# EAGLE board Adafruit BNO055 (EAGLE 6.6.0)
REV: C
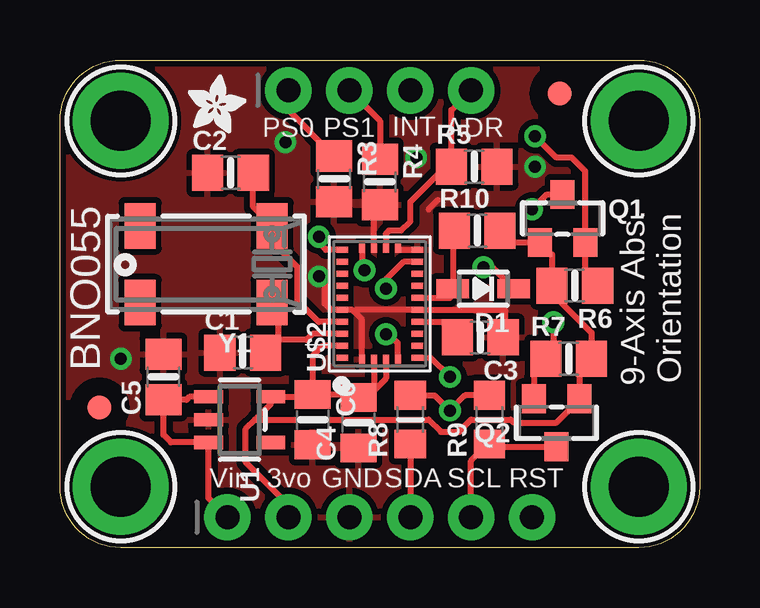
[diagram p0: board, top side]
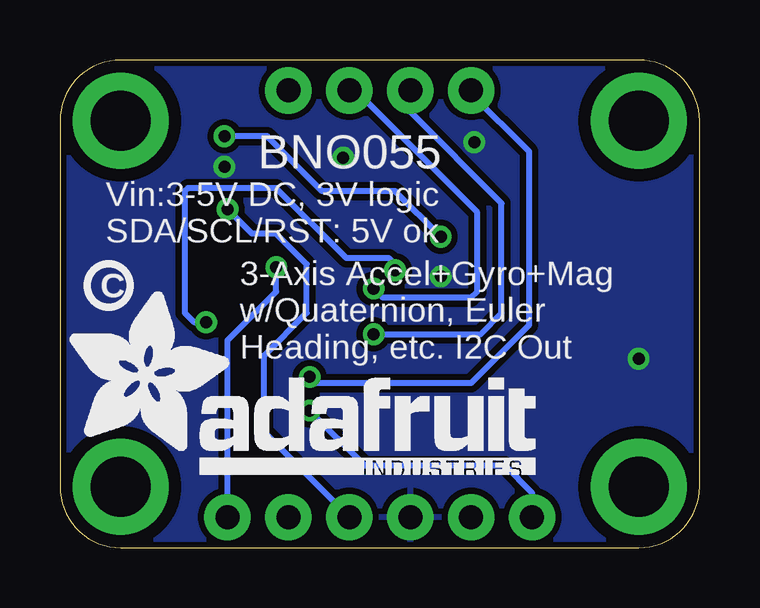
[diagram p1: board, bottom side, seen from below]

Size 26.67 x 20.32 mm. Coordinates in mm from the lower left corner, seen from the top.
Outline: 2.54,20.32 24.13,20.32 arc-90 26.67,17.78 26.67,2.54 arc-90 24.13,0 2.54,0 arc-90 0,2.54 0,17.78 arc-90 2.54,20.32
Copper layers (1*16): Top 0.035mm / dielectric 1.5mm / Bottom 0.035mm
Design rules "adafruit *": minimum track width 8mil, minimum drill 15.5mil, track to track 8mil, track to pad 8mil, pad to pad 8mil, via to via 8mil, smd to smd 8mil, copper to edge 10mil, drill to drill 8mil, minimum pad ring 10mil, minimum via ring 8mil, stop-mask expansion 2mil, vias tented up to drill 20mil, thermal gap 10mil

## Footprints (pad centres in the part's own frame; a part is rotated, then mirrored left to right if it is on the bottom)
0805-NO = smd 1.3 x 1.5: 1 -0.95,0; 2 0.95,0
0805_10MGAP = smd 1.2 x 1.5: 1 -1.05,0; 2 1.05,0
SOD-323 = smd 1.35 x 0.8: A 1.27,0; C -1.27,0
FIDUCIAL_1MM = smd 1 x 1: 1 0,0
1X06_ROUND_76 = drill 1 pad 1.93: 1 -6.35,0; 2 -3.81,0; 3 -1.27,0; 4 1.27,0; 5 3.81,0; 6 6.35,0
1X04_ROUND_76 = drill 1 pad 1.93: 1 -3.81,0; 2 -1.27,0; 3 1.27,0; 4 3.81,0
SOT23-WIDE = smd 1 x 1.2: 1 -0.95,-1; 2 0.95,-1; 3 0,1
_0805MP = smd 1.2 x 1.3: 1 -1.016,0; 2 1.016,0
SOT23-5 = smd 0.55 x 1.2: 1 -0.95,-1.3; 2 0,-1.3; 3 0.95,-1.3; 4 0.95,1.3; 5 -0.95,1.3
BNO055 = smd 0.25 x 0.475: 1 -2.25,1.562; 6 -2.25,-1.562; 7 -1.75,-1.562; 8 -1.25,-1.562; 9 -0.75,-1.562; 10 -0.25,-1.562; 11 0.25,-1.562; 12 0.75,-1.562; 13 1.25,-1.562; 14 1.75,-1.562; 15 2.25,-1.562; 20 2.25,1.562; 21 1.75,1.562; 22 1.25,1.562; 23 0.75,1.562; 24 0.25,1.562; 25 -0.25,1.562; 26 -0.75,1.562; 27 -1.25,1.562; 28 -1.75,1.562 | smd 0.375 x 0.25: 2 -2.312,0.75; 3 -2.312,0.25; 4 -2.312,-0.25; 5 -2.312,-0.75; 16 2.312,-0.75; 17 2.312,-0.25; 18 2.312,0.25; 19 2.312,0.75
MOUNTINGHOLE_2.5_PLATED_THICK = drill 2.5 pad 4: P$1 0,0
CRYSTAL_8X3.8 = smd 1.3 x 1.9: P$1 -2.75,-1.6; P$2 2.75,-1.6; P$3 2.75,1.6; P$4 -2.75,1.6

## Placement (x,y rotation side)
C1  22pF  [0805-NO]  7.62,8.13 0 top
C2  22pF  [0805-NO]  7.11,15.62 0 top
C3  0.1uF  [0805-NO]  17.53,8.76 180 top
C4  0.1uF  [0805_10MGAP]  12.45,5.21 90 top
C5  10uF  [0805-NO]  4.32,7.11 90 top
C6  10uF  [0805_10MGAP]  10.54,5.33 270 top
D1  1n4148  [SOD-323]  17.65,10.79 180 top
FID1  FIDUCIAL""  [FIDUCIAL_1MM]  20.83,18.92 0 top
FID2  FIDUCIAL""  [FIDUCIAL_1MM]  1.65,5.84 0 top
JP1  [1X06_ROUND_76]  13.34,1.27 0 top
JP2  [1X04_ROUND_76]  13.34,19.05 0 top
Q1  BSS138  [SOT23-WIDE]  20.95,13.72 0 top
Q2  BSS138  [SOT23-WIDE]  20.7,5.21 180 top
R3  10K  [0805-NO]  11.43,15.37 270 top
R4  10K  [0805-NO]  13.34,15.24 270 top
R5  10K  [0805-NO]  17.27,15.88 0 top
R6  10K  [0805-NO]  21.46,10.92 180 top
R7  10K  [0805-NO]  21.21,7.87 0 top
R8  10K  [_0805MP]  14.61,5.33 90 top
R9  10K  [_0805MP]  17.91,5.33 90 top
R10  10K  [0805-NO]  17.4,13.21 0 top
U1  MIC5225-3.3  [SOT23-5]  7.49,5.33 270 top
U$2  BNO055  [BNO055]  13.34,10.16 90 top
U$3  [PCBFEAT-REV-040]  24.64,10.92 0 bottom
U$28  [ADAFRUIT_TEXT_20MM]  26.42,3.05 0 bottom
U$29  MOUNTINGHOLE2.5_THICK  [MOUNTINGHOLE_2.5_PLATED_THICK]  2.54,17.78 0 top
U$30  MOUNTINGHOLE2.5_THICK  [MOUNTINGHOLE_2.5_PLATED_THICK]  2.54,2.54 0 top
U$31  MOUNTINGHOLE2.5_THICK  [MOUNTINGHOLE_2.5_PLATED_THICK]  24.13,17.78 0 top
U$32  MOUNTINGHOLE2.5_THICK  [MOUNTINGHOLE_2.5_PLATED_THICK]  24.13,2.54 0 top
U$33  [ADAFRUIT_2.5MM]  5.33,17.27 0 top
Y1  32.768kHz  [CRYSTAL_8X3.8]  6.1,11.81 180 top

## Library data of the parts
C1-C6 D1 JP1 JP2 Q1 Q2 R3-R10 U1 U$2 U$3 U$28 U$33 Y1 = microbuilder
FID1 FID2 U$29-U$32 = microbuilder; BOM: EXCLUDE

## Nets
3.3V: C4.2 C6.1 JP1.2 Q1.1 Q2.1 R6.2 R7.2 R10.2 U1.5 U$2.3 U$2.4 U$2.28
5.0V: C5.1 JP1.1 R8.2 R9.2 U1.1 U1.3
GND: C1.1 C2.1 C3.1 C4.1 C5.2 C6.2 JP1.3 R3.2 R4.2 R5.2 U1.2 U$2.2 U$2.10 U$2.15 U$2.16 U$2.18 U$2.25
I2CADDR_3V: JP2.4 R5.1 U$2.17
INT_3V: JP2.3 U$2.14
N$1: C1.2 U$2.27 Y1.P$4
N$2: C2.2 U$2.26 Y1.P$1
N$3: C3.2 U$2.9
NRESET_3V: D1.A R10.1 U$2.11
PS0_3V: JP2.1 R3.1 U$2.6
PS1_3V: JP2.2 R4.1 U$2.5
RST_5V: D1.C JP1.6
SCL_3V: Q2.2 R7.1 U$2.19
SCL_5V: JP1.5 Q2.3 R9.1
SDA_3V: Q1.2 R6.1 U$2.20
SDA_5V: JP1.4 Q1.3 R8.1

## Tracks (layer width: path | path; a pad name or v marks a point on that pad's centre or on a via)
3.3V
  Top 0.254: U$2.3 13.09,6.55 | U$2.4 13.59,7.05 13.09,6.55 | U$2.28 10.95,8.41 10.54,8 C6.1 | 22.03,7.75 R7.2 | JP1.2 9.53,1.78 7.75,3.56 7.75,4.95 8.13,5.33 | 8.13,5.33 8.79,6 U1.5 10.44,6.28 C6.1 | 8.13,5.33 15.37,5.33 15.88,4.83 16.64,4.83 17.14,5.33 18.8,5.33 18.92,5.21 20.7,5.21 21.65,6.16 Q2.1 21.65,7.37 R7.2 | R10.2 18.84,12.72 Q1.1 20.51,12.21 R6.2 20.51,10.6 22.16,8.96 R7.2 | C6.1 12.32,6.38 C4.2 12.8,6.26 13.09,6.55
5.0V  (via drill 0.5)
  Top 0.254: JP1.1 6.19,2.06 U1.3 4.63,4.38 4.32,4.7 C5.1 5.27,6.16 5.39,6.28 U1.1 | R8.2 15.62,6.35 v16.26,5.71 16.89,6.35 R9.2
  Bottom 0.254: v16.26,5.71 13.97,3.43 8.13,3.43 6.99,2.29 JP1.1
GND  (via drill 0.5)
  Top 0.254: U$2.2 12.59,9.51 12.26,9.84 | 12.26,9.84 12.19,9.91 U$2.25 11.3,9.91 11.05,10.16 11.05,11.18 | U$2.18 13.09,14.04 R4.2 | U$2.16 14.15,12.41 U$2.15 | C3.1 18.54,8.83 18.54,9.91 U$2.10 12.32,9.91 12.26,9.84 | 15.37,14.1 15.75,14.48 | 17.91,15.88 R5.2
  Bottom 0.254: 10.92,11.56 10.79,11.68
  other vias: 2.54,7.87 9.4,16.89 19.81,15.88 10.79,11.3 14.86,16.26
  pour Bottom (isolate 0.254): 0,20.32 26.67,20.32 26.67,0 0,0
  pour Top (isolate 0.254): 0,20.32 26.67,20.32 26.67,0 0,0
I2CADDR_3V
  Top 0.254: U$2.17 13.59,13.08 13.72,13.21 14.22,13.21 14.61,13.59 14.61,14.41 16.07,15.88 R5.1 16.32,18.23 JP2.4
INT_3V  (via drill 0.5)
  Top 0.254: U$2.14 14.32,11.91 13.59,11.18 v13.59,10.79
  Bottom 0.254: v13.59,10.79 13.21,10.41 9.53,10.41 9.27,10.67 9.27,13.97 14.35,19.05 JP2.3
N$1
  Top 0.254: U$2.27 10.53,8.91 10.28,8.66 9.1,8.66 | 9.1,8.66 C1.2 | Y1.P$4 9.1,9.96 9.1,8.66
N$2
  Top 0.254: U$2.26 10.78,9.41 9.91,10.29 9.91,11.68 8.85,12.74 Y1.P$1 8.06,14.2 C2.2
N$3
  Top 0.254: U$2.9 15.93,9.41 C3.2
NRESET_3V
  Top 0.254: U$2.11 16.25,10.41 16.38,10.54 D1.A 16.38,13.27 R10.1
PS0_3V  (via drill 0.5)
  Top 0.254: JP2.1 9.53,18.22 R3.1 | U$2.6 15.46,7.91 v16.26,7.11
  Bottom 0.254: JP2.1 9.53,18.92 7.11,16.51 7.11,9.27 9.53,6.86 16,6.86 v16.26,7.11
PS1_3V  (via drill 0.5)
  Top 0.254: JP2.2 13.34,17.78 R4.1 | U$2.5 14.09,8.52 13.72,8.89 v13.59,8.89
  Bottom 0.254: v13.59,8.89 9.14,8.89 8.26,9.78 8.26,14.35 12.06,18.16 JP2.2
RST_5V  (via drill 0.5)
  Top 0.254: D1.C 18.03,11.68 v17.65,11.68
  Bottom 0.254: JP1.6 19.68,8.64 17.65,10.67 v17.65,11.68
SCL_3V  (via drill 0.5)
  Top 0.254: U$2.19 12.59,11.67 v12.7,11.56 | v20.57,9.4 20.57,7.94 20.51,7.87 R7.1 19.75,7.37 Q2.2
  Bottom 0.254: v12.7,11.56 12.7,11.81 12.95,12.06 14.73,12.06 17.65,14.99 21.34,14.99 21.46,14.86 21.46,9.78 21.08,9.4 v20.57,9.4
SCL_5V
  Top 0.254: JP1.5 17.14,3.62 17.84,4.32 R9.1 18.02,4.21 Q2.3
SDA_3V  (via drill 0.5)
  Top 0.254: U$2.20 11.09,12.41 10.79,12.7 v10.79,12.95 | R6.1 21.91,11.43 Q1.2 21.91,15.69 21.34,16.26 20.7,16.26 v19.81,17.14
  Bottom 0.254: v10.79,12.95 12.7,14.86 15.75,14.86 18.03,17.14 v19.81,17.14
SDA_5V  (via drill 0.5)
  Top 0.254: R8.1 JP1.4 | v19.68,14.1 20.3,14.72 Q1.3
  Bottom 0.254: JP1.4 18.16,4.83 18.16,8 16.38,9.78 16.38,11.81 17.65,13.08 18.67,13.08 v19.68,14.1

## Text on the board
tPlace: PS0 | PS1 | INT | ADR | BNO055 | 9-Axis Abs. / Orientation | Vin | 3vo | GND | SDA | SCL | RST
bPlace: BNO055 | Vin:3-5V DC, 3V logic / SDA/SCL/RST: 5V ok | 3-Axis Accel+Gyro+Mag / w/Quaternion, Euler / Heading, etc. I2C Out